# EAGLE board LEDLightSticks_V2--05--Wall_Pwr_to_Molex_PCB_v15 (EAGLE 9.7.0)
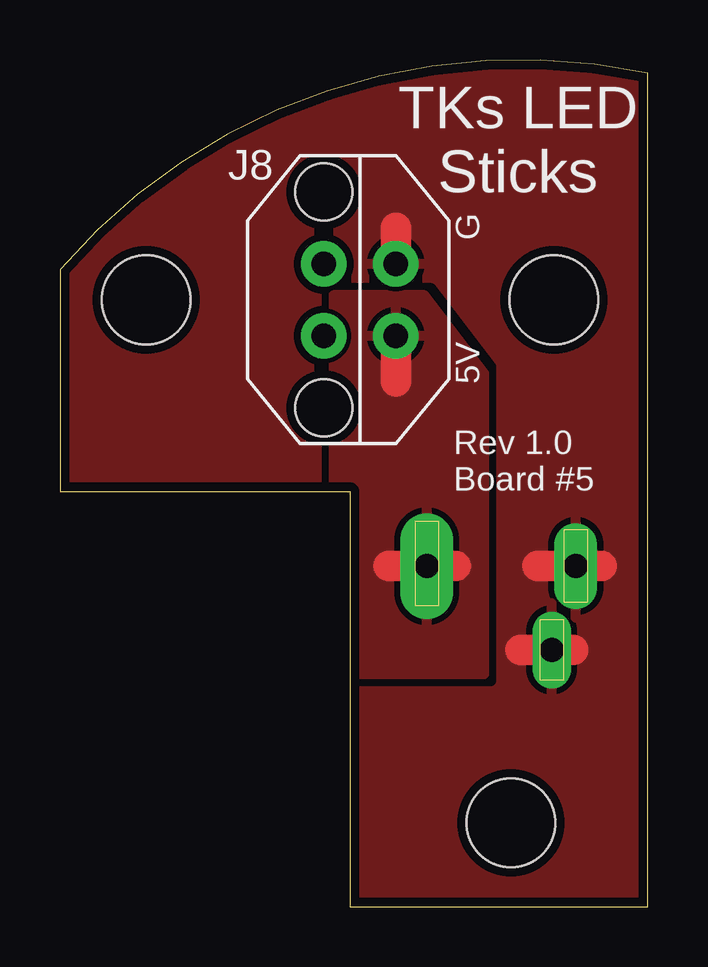
[diagram p0: board, top side]
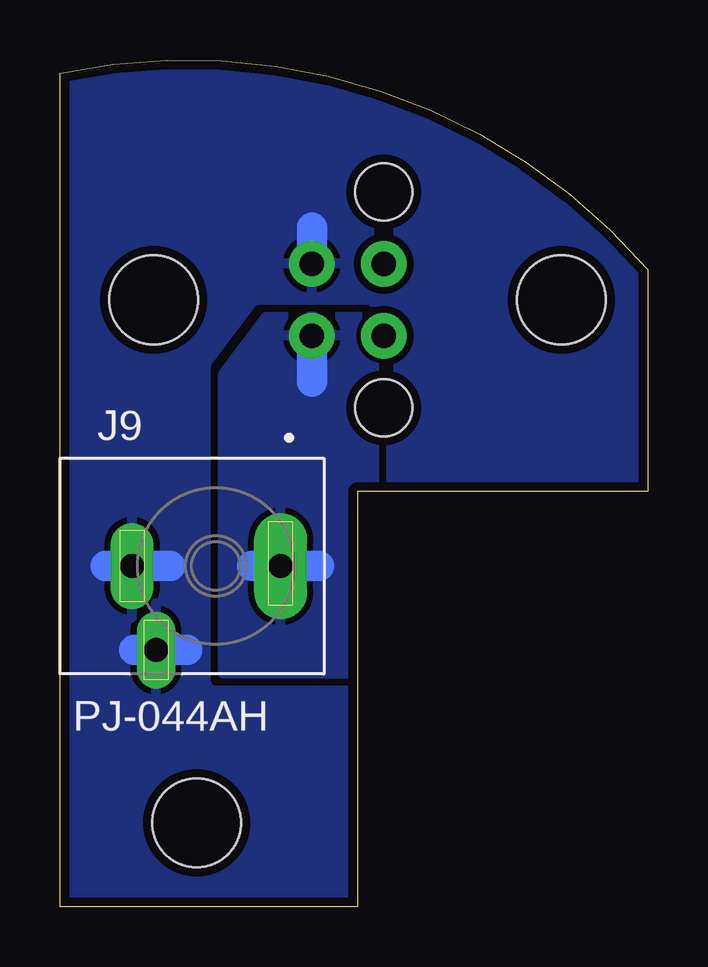
[diagram p1: board, bottom side, seen from below]

Size 24.5 x 35.3 mm. Coordinates in mm from the lower left corner, seen from the top.
Outline: 0,26.57 0,17.3 12.1,17.3 12.1,0 24.5,0 24.5,34.75 arc61 0,26.57
Copper layers (1*16): Top 0.035mm / dielectric 1.5mm / Bottom 0.035mm
Design rules "TKs_CustomDRU": minimum track width 10mil, minimum drill 20mil, track to track 8mil, track to pad 8mil, pad to pad 8mil, via to via 8mil, smd to smd 8mil, copper to edge 15mil, drill to drill 15mil, minimum pad ring 12mil, minimum via ring 10mil, stop-mask expansion 4mil, vias tented up to drill 20mil, thermal gap 10mil
Holes 3.7 mm at 3.59,25.3 20.59,25.3 18.8,3.5

## Footprints (pad centres in the part's own frame; a part is rotated, then mirrored left to right if it is on the bottom)
MICROFIT_2X2_VERT_FEMALE = drill 1.016 pad 1.88: 1 0,0; 2 3,0; 3 0,3; 4 3,3 | hole 2.36: 6,3; -3,3
CUI_PJ-044AH = drill 1 pad 2.2 long: 1 0,3.7 | drill 1 pad 1.8 long: 2 0,-2.5 | drill 1 long: 3 3.5,-1.5

## Placement (x,y rotation side)
J8  MOLEX-MICRO-FIT-2X02VERT-FEMALE  [MICROFIT_2X2_VERT_FEMALE]  14,23.8 90 top
J9  PJ-044AH  [CUI_PJ-044AH]  19,14.2 270 bottom

## Library data of the parts
J8 = LED_Light_Sticks_Library
J9 = LED_Light_Sticks_Library; MANUFACTURER: CUI; PARTREV: 1.02; STANDARD: Manufacturer Recommendations

## Nets
GND: J8.2 J9.2 J9.3
VIN: J8.1 J9.1

## Tracks (layer width: path | path; a pad name or v marks a point on that pad's centre or on a via)
GND
  Top 1.27: J8.2 14,28.3 | 19.2,10.7 J9.3 21.4,10.7 | 19.9,14.2 J9.2 22.6,14.2
  Bottom 1.27: J8.2 14,28.3 | 19.2,10.7 J9.3 21.4,10.7 | 19.9,14.2 J9.2 22.6,14.2
  pour Bottom (isolate 0.305, rank 2): 0.2,0.2 24.3,0.2 24.3,35.1 0.2,35.1
  pour Top (isolate 0.305, rank 2): 0.2,0.2 24.3,0.2 24.3,35.1 0.2,35.1
VIN
  Top 1.27: J8.1 14,21.9 | 13.7,14.2 J9.1 16.5,14.2
  Bottom 1.27: J8.1 14,21.9 | 13.7,14.2 J9.1 16.5,14.2
  pour Top: 11.4,9.7 17.7,9.7 17.7,22.23 15.2,25.5 11.4,25.5
  pour Bottom: 11.4,9.7 17.7,9.7 17.7,22.23 15.91,24.6 11.4,24.6

## Text on the board
tPlace: TKs LED / Sticks | G | 5V | Rev 1.0 / Board #5